# EAGLE board WaterbedSlave (EAGLE 7.5.0)
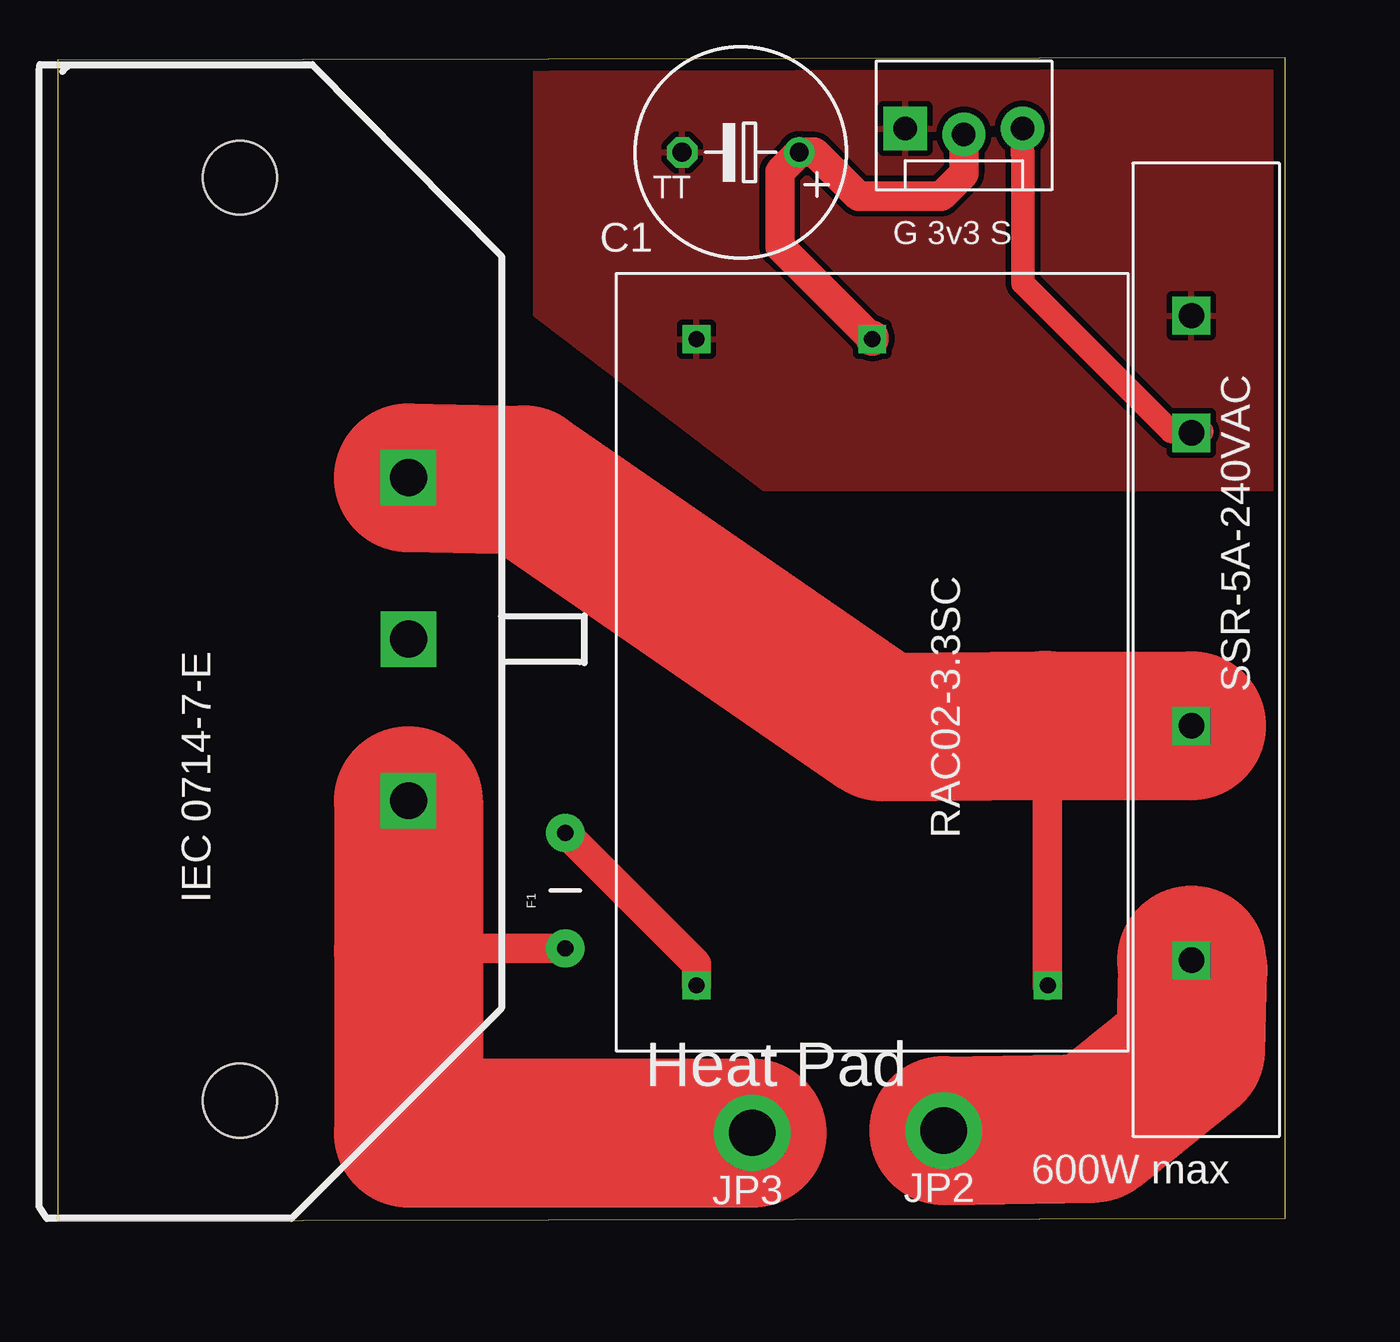
[diagram p0: board, top side]
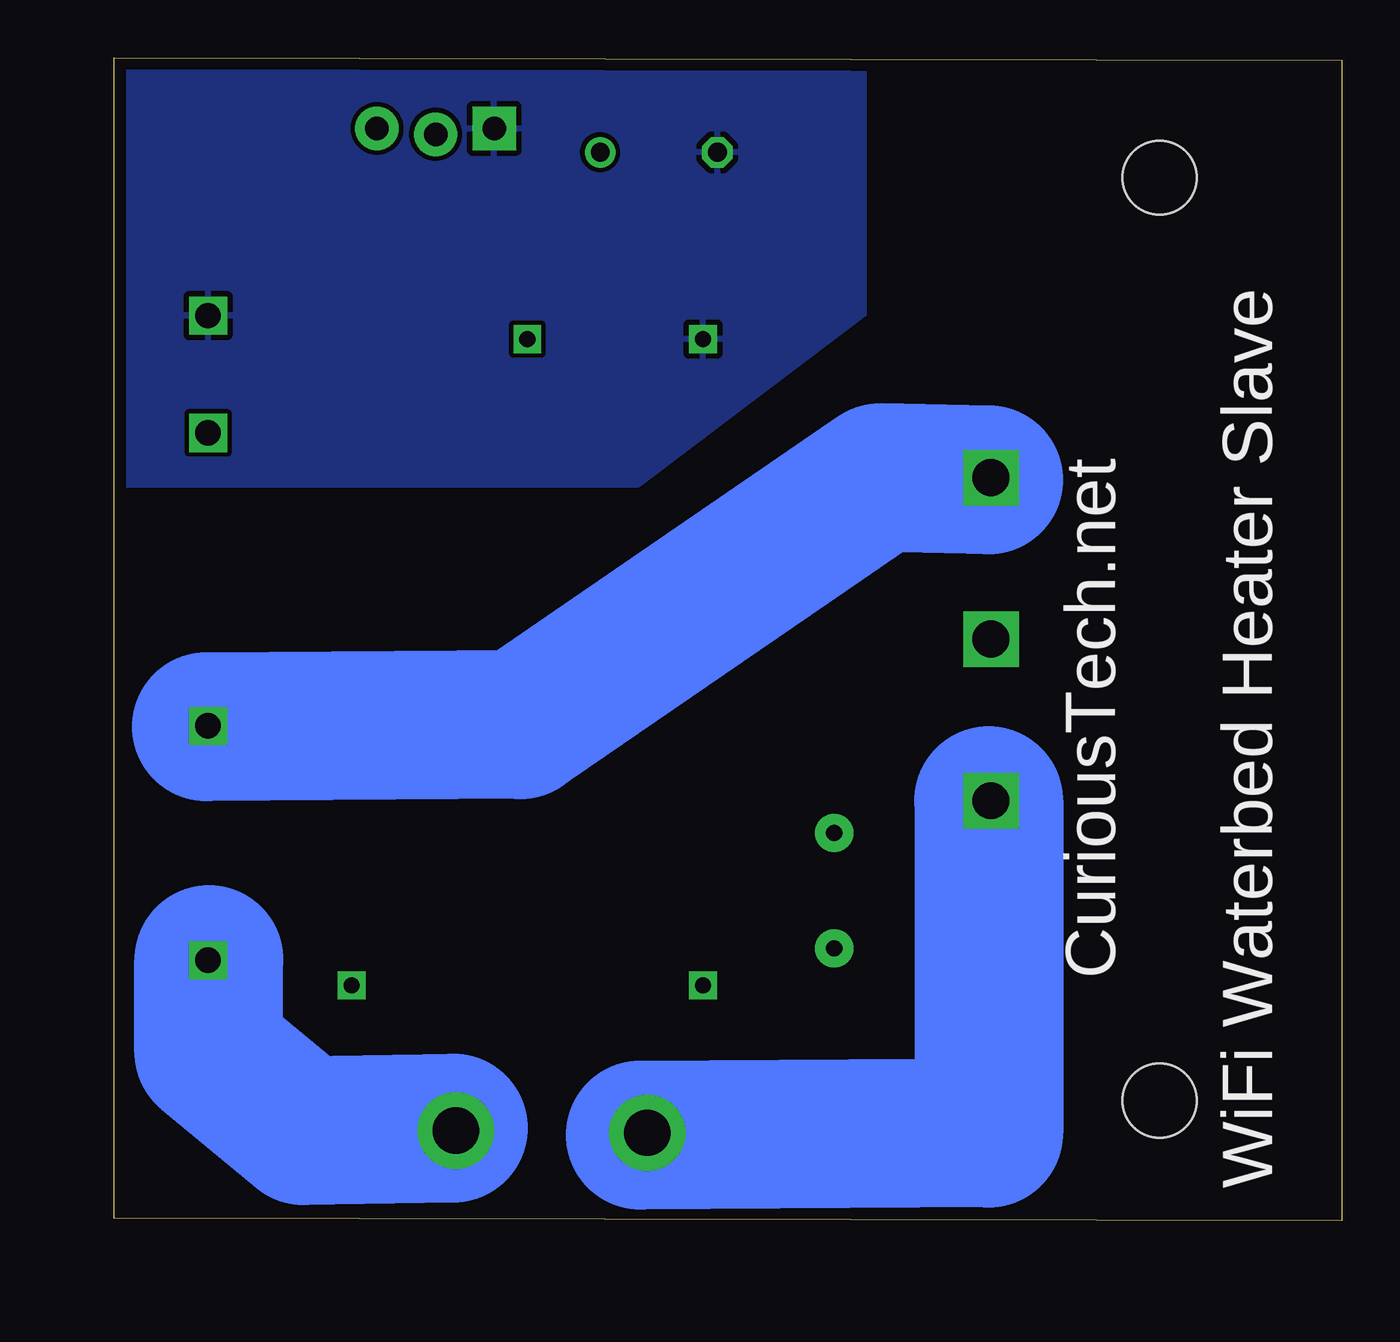
[diagram p1: board, bottom side, seen from below]

Size 53.21 x 50.4 mm. Coordinates in mm from the lower left corner, seen from the top.
Outline: 0,0 53.21,0.1 53.21,50.4 0,50.3 0,0
Copper layers (1*16): Top 0.035mm / dielectric 1.5mm / Bottom 0.035mm
Design rules "default *": minimum track width 10mil, minimum drill 24mil, track to track 8mil, track to pad 8mil, pad to pad 8mil, via to via 8mil, smd to smd 8mil, copper to edge 20mil, drill to drill 8mil, minimum pad ring 10mil, minimum via ring 8mil, stop-mask expansion 4mil, vias tented up to drill 0mil, thermal gap 10mil

## Footprints (pad centres in the part's own frame; a part is rotated, then mirrored left to right if it is on the bottom)
TT5D9 = drill 0.813: + -2.54,0 | drill 0.813 octagon: - 2.54,0
CAP-PTH-5MM = drill 0.7 pad 1.651: 1 -2.5,0; 2 2.5,0
MOLEX-1X3_LOCK = drill 1.016 pad 1.88 square: 1 0,0.127 | drill 1.016 pad 1.88: 2 2.54,-0.127; 3 5.08,0.127
1X01_2MM = drill 2 pad 3.302: 1 0,0
RAC02-3.3SC = drill 0.7 square: 3V3 14,7.62; AC1 -14,7.62; AC2 -14,-7.62; GND 14,0
SIP-4 = drill 1.1 square: P$1 -13.97,0; P$2 -8.89,0; P$3 3.81,0; P$4 13.97,0
IEC = drill 1.6 square: G 7.3,0; H 7.3,7; L 7.3,-7 | hole 3.2: 0,20; 0,-20

## Placement (x,y rotation side)
C1  330uF  [TT5D9]  29.6,46.3 180 top
F1  [CAP-PTH-5MM]  22,14.3 90 top
JP1  [MOLEX-1X3_LOCK]  36.73,47.21 0 top
JP2  [1X01_2MM]  38.4,3.9 180 top
JP3  [1X01_2MM]  30.1,3.8 180 top
SUPP  RAC02-3.3SC  [RAC02-3.3SC]  35.3,24.2 90 top
U$2  SSR-5A-240VAC  [SIP-4]  49.13,25.25 270 top
U$3  IEC 0714-7-E  [IEC]  7.9,25.2 0 top

## Library data of the parts
C1 = resistor
F1 = SparkFun-Capacitors
JP1-JP3 = SparkFun-Connectors
SUPP U$2 U$3 = CuriousTech

## Nets
GND: C1.- JP1.1 SUPP.3V3 U$2.P$1
N$1: F1.1 JP3.1 U$3.L
N$5: F1.2 SUPP.AC1
N$6: JP2.1 U$2.P$4
N$14: SUPP.AC2 U$2.P$3 U$3.H
N$15: C1.+ JP1.2 SUPP.GND
N$16: JP1.3 U$2.P$2

## Tracks (layer width: path | path; a pad name or v marks a point on that pad's centre or on a via)
GND
  pour Top (isolate 0.254): 20.71,50.34 20.71,39.29 30.6,31.76 53.38,31.76 53.38,50.34
  pour Bottom (isolate 0.01): 20.7,50.3 53.3,50.3 53.3,31.9 30.5,31.9 20.7,39.3
N$1
  Top 1.27: F1.1 15.2,11.8 15.2,11.7
  Top 6.452: U$3.L 15.2,11.7 15.2,3.8 JP3.1
N$2
  Bottom 6.452: 15.3,32.1 20,32.2 35.6,21.5 49.2,21.4
N$3
  Bottom 6.452: 15.3,18.2 15.3,3.8 30.4,3.7
N$4
  Bottom 6.452: 38.5,4 45,3.9 49.1,7.3 49.1,11.3
N$5
  Top 1.27: SUPP.AC1 27.68,11.12 F1.2
N$6
  Top 6.452: JP2.1 44.9,4 49.1,7.4 49.2,10.85 U$2.P$4
N$14
  Top 1.27: SUPP.AC2 42.9,10.2 42.9,20.8 42.8,20.8 42.8,21.46
  Top 6.452: U$3.H 20.2,32.1 35.7,21.4 42.8,21.46 U$2.P$3
N$15
  Top 1.27: JP1.2 39.27,45.37 38.3,44.4 34.7,44.4 32.8,46.3 C1.+ 31.3,45.46 31.3,42.2 SUPP.GND
  Top 1.422: SUPP.GND 35.3,38.3
N$16
  Top 1.016: JP1.3 41.81,46.22 41.84,46.29 41.84,40.62 48.27,34.19 49.59,34.19 U$2.P$2

## Text on the board
tPlace: G 3v3 S | Heat Pad | 600W max
bPlace: CuriousTech.net | WiFi Waterbed Heater Slave